# EAGLE board ESP32 Relay Mainboard (EAGLE 9.3.0)
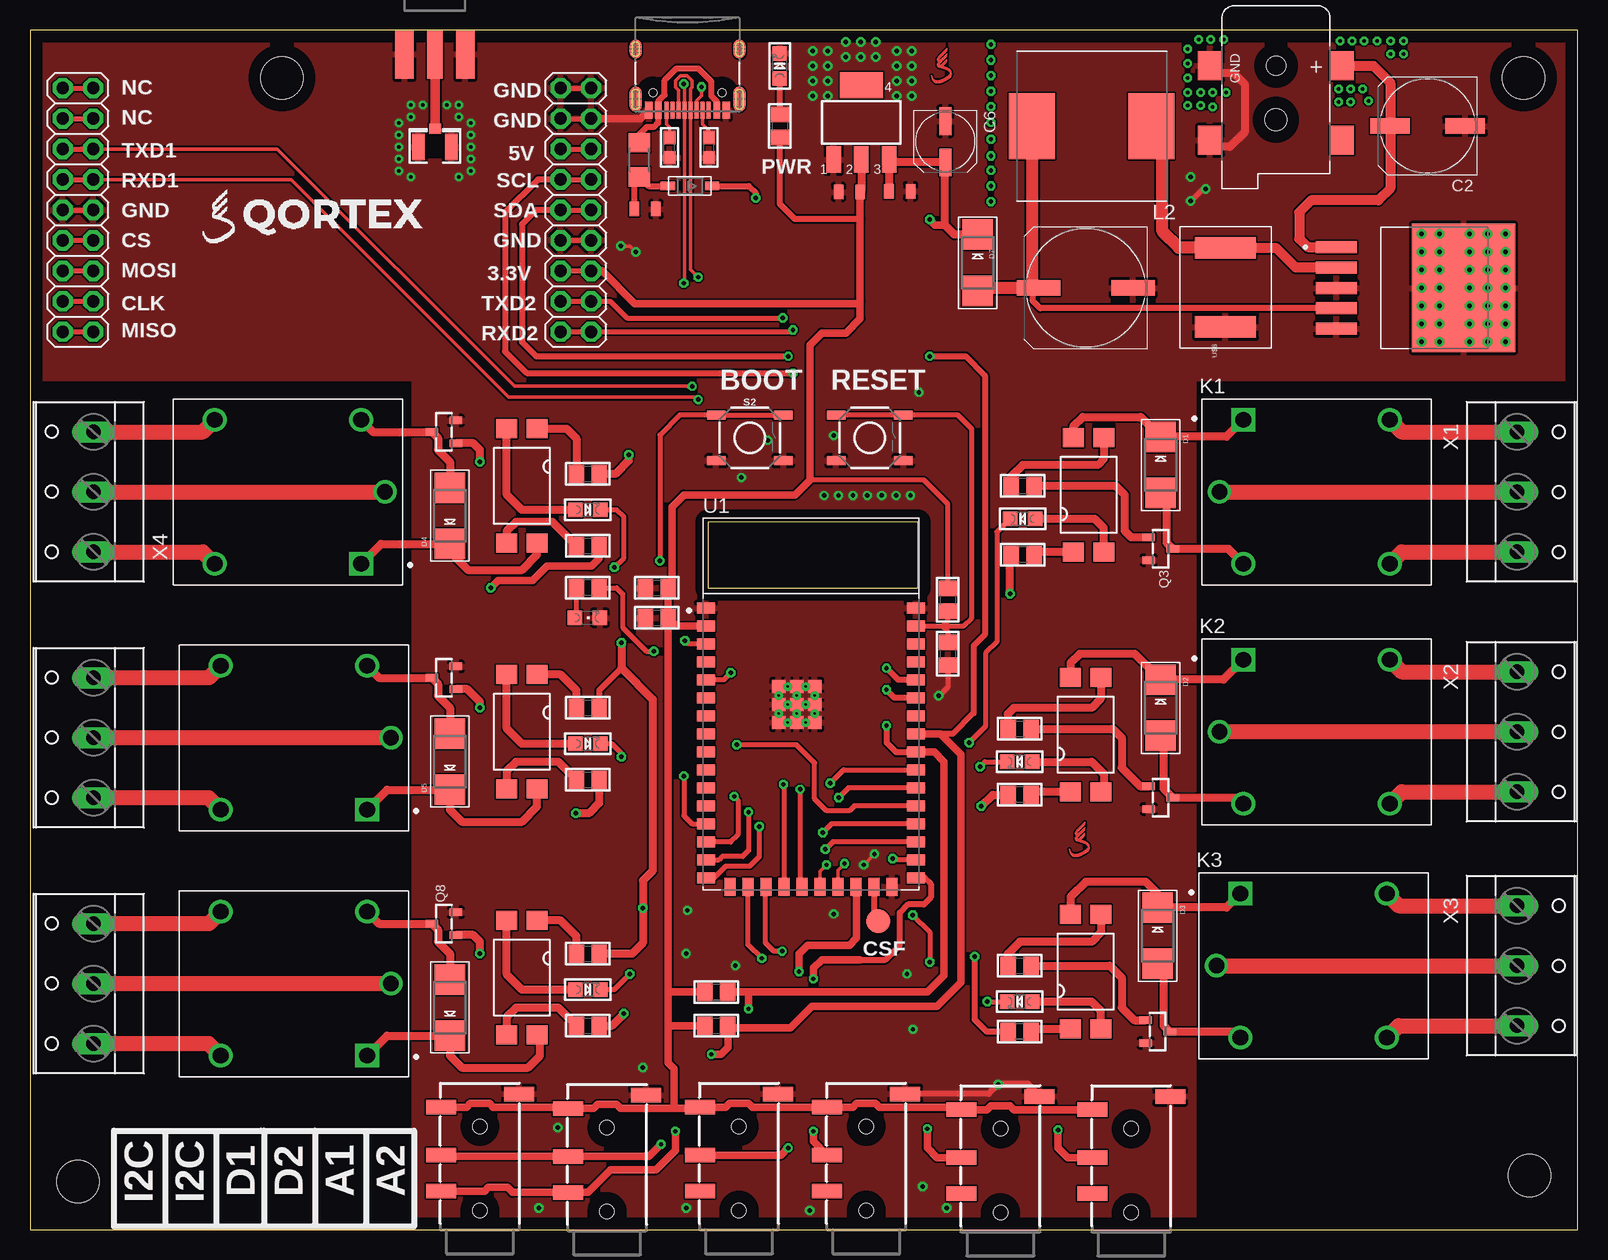
[diagram p0: board, top side]
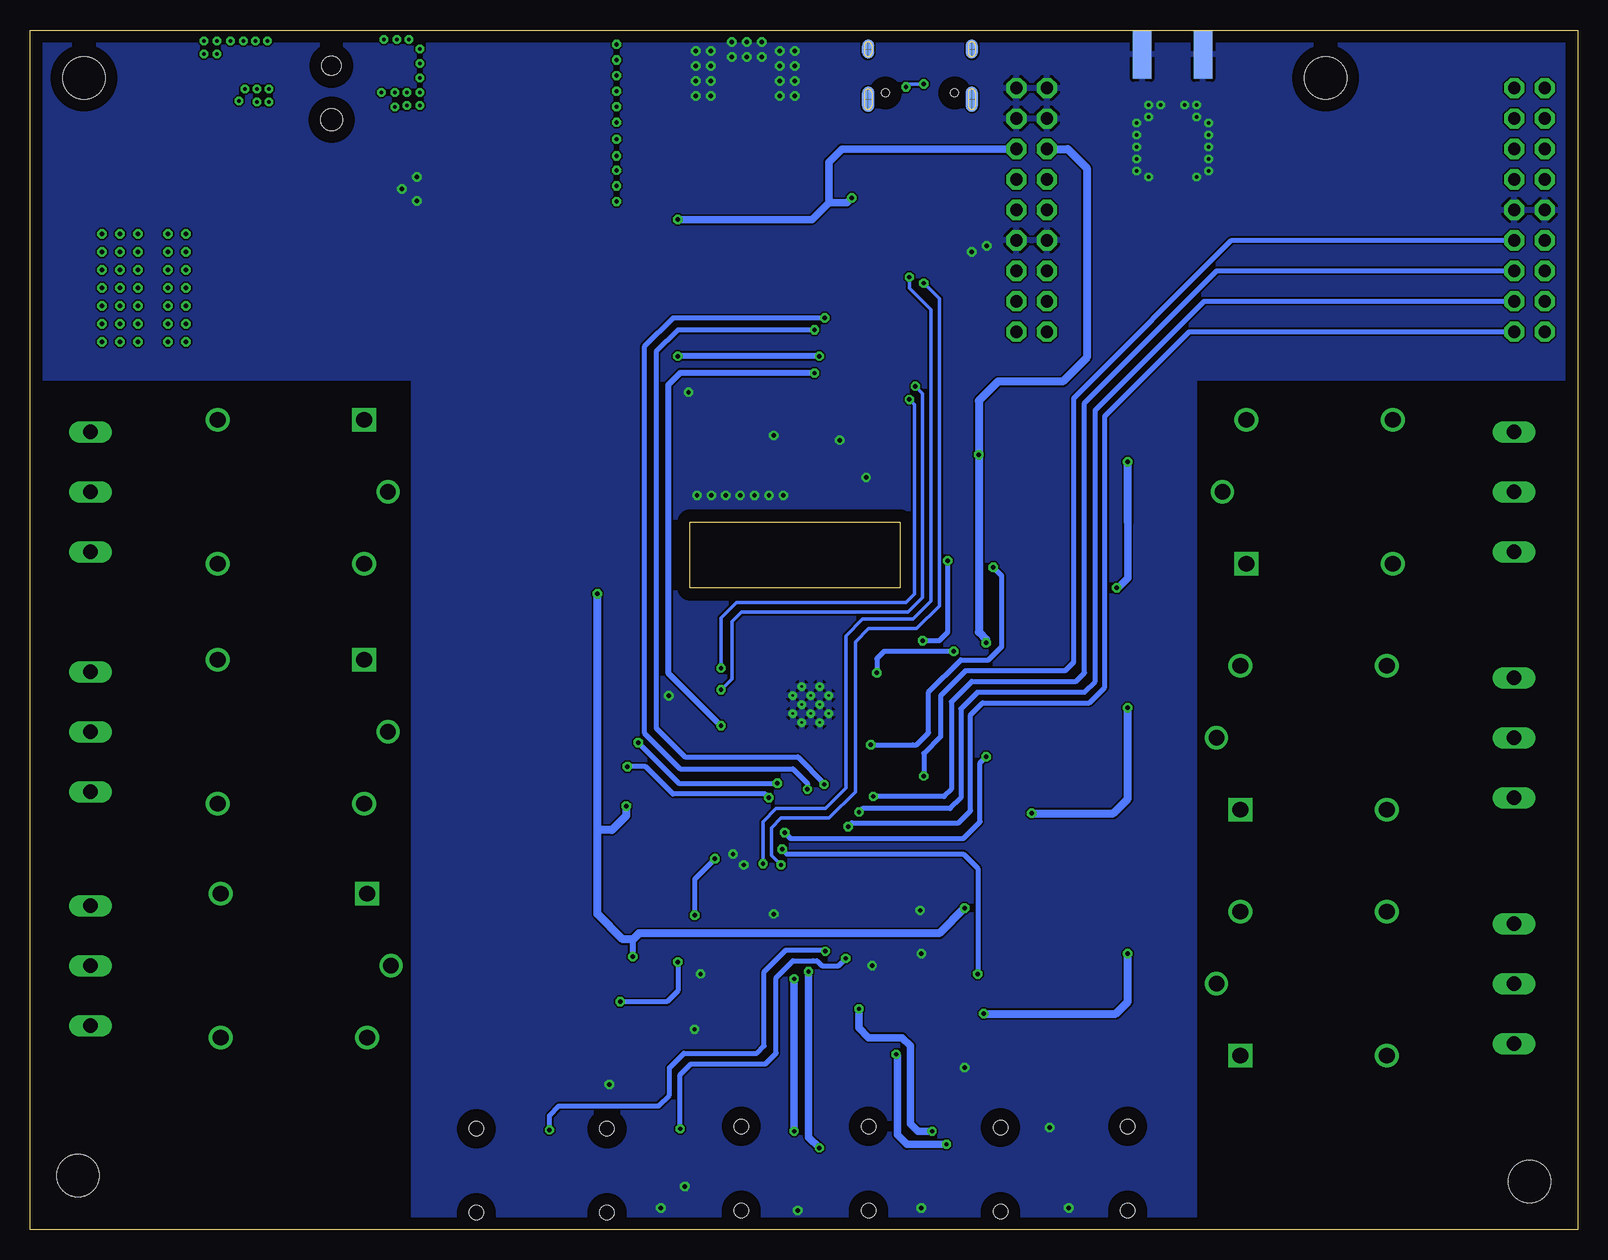
[diagram p1: board, bottom side, seen from below]

Size 129 x 100 mm. Coordinates in mm from the lower left corner, seen from the top.
Outline: 0,0 129,0 129,100 0,100 0,0
Outline: 56.5,59 56.5,53.5 74,53.5 74,59 56.5,59
Copper layers (1*16): Top 0.035mm / dielectric 1.5mm / Bottom 0.035mm
Design rules "default *": minimum track width 6mil, minimum drill 0.35mm, track to track 6mil, track to pad 6mil, pad to pad 6mil, via to via 6mil, smd to smd 6mil, copper to edge 40mil, drill to drill 6mil, minimum pad ring 10mil, minimum via ring 8mil, stop-mask expansion 4mil, vias tented up to drill 13mil, thermal gap 10mil
Holes 3.5 mm at 124.5,96 4,4 125,4.5 21,96

## Footprints (pad centres in the part's own frame; a part is rotated, then mirrored left to right if it is on the bottom)
SOT223 = smd 1.219 x 2.235: 1 -2.311,-3.099; 2 0,-3.099; 3 2.311,-3.099 | smd 3.6 x 2.2: 4 0,3.099
0805 = smd 0.8 x 1.2: 1 -0.9,0; 2 0.9,0
UD-8X10_NICHICON = smd 3.3 x 1.3: + 3.125,0; - -3.125,0
UD-10X10_NICHICON = smd 3.6 x 1.3: + 3.925,0; - -3.95,0
UD-5X5,8_NICHICON = smd 2.3 x 1: + 1.725,0; - -1.7,0
0805' = smd 1.3 x 1.5: 1 -0.95,0; 2 0.95,0
DCJACK_2MM_SMT = smd 2.4 x 2: GND 0,-5.5; GNDBREAK 6.2,-5.5; PWR1 0,5.5; PWR2 6.2,5.5 | hole 1.6: 0,0 | hole 1.8: 4.5,0
USB-C-16P = smd 0.3 x 1.45: A5 -1.25,0; A6 -0.25,0; A7 0.25,0; A8 1.25,0; B5 1.75,0; B6 0.75,0; B7 -0.75,0; B8 -1.75,0 | smd 0.6 x 1.45: GND -3.225,0; GND2 3.225,0 | smd 1 x 2.1: SHLD1 -4.32,-0.915; SHLD2 4.32,-0.915 | smd 1 x 2.1 bottom: SHLD3 -4.32,-0.915; SHLD4 4.32,-0.915 | smd 1 x 1.6: SHLD5 -4.32,-5.095; SHLD8 4.32,-5.095 | smd 1 x 1.6 bottom: SHLD6 -4.32,-5.095; SHLD7 4.32,-5.095 | smd 0.55 x 1.45: VBUS1 -2.45,0; VBUS2 2.45,0 | hole 0.65: -2.89,-1.445; 2.89,-1.445
SMADIODE = smd 2.54 x 2.54: A 2.349,0; C -2.349,0
SOD-123 = smd 1.2 x 0.7: A 1.85,0; C -1.85,0
R1206 = smd 1.6 x 1.803: 1 -1.422,0; 2 1.422,0
AUDIO_JACK_3.5MM_TRRS_SMD_RA = smd 1.2 x 2.5: EARTH 11.3,-3.25; RING1 6.2,3.25; RING2 3.2,3.25; TIP 10.2,3.25 | hole 1.2: 1.6,0; 8.6,0
2X09-BIG = drill 1.016 pad 1.676 octagon: 1 -10.16,-1.27; 2 -10.16,1.27; 3 -7.62,-1.27; 4 -7.62,1.27; 5 -5.08,-1.27; 6 -5.08,1.27; 7 -2.54,-1.27; 8 -2.54,1.27; 9 0,-1.27; 10 0,1.27; 11 2.54,-1.27; 12 2.54,1.27; 13 5.08,-1.27; 14 5.08,1.27; 15 7.62,-1.27; 16 7.62,1.27; 17 10.16,-1.27; 18 10.16,1.27
RELAY_SRD-05VDC-SL-C = drill 1.32 square: A1 -6.1,6 | drill 1.32: A2 -6.1,-6; NC 6.1,6; NO 6.1,-6 | drill 1.29: COM -8.1,0
INDM1250X1250X600 = smd 3.85 x 5.5: 1 -4.975,0; 2 4.975,0
CHIPLED_0805 = smd 1.2 x 1.2: A 0,-1.05; C 0,1.05
SMD4-7 = smd 1.78 x 1.55: 1 -1.27,-4.77; 2 1.27,-4.77; 3 1.27,4.77; 4 -1.27,4.77
SOT23-R = smd 0.635 x 1.016: 1 -0.95,-1; 2 0.95,-1; 3 0,1
0603 = smd 1.1 x 1: 1 -0.85,0; 2 0.85,0
TACTILE_SWITCH_SMD_5.2MM = smd 1.524 x 0.762: 1 -2.794,1.905; 2 2.794,1.905; 3 -2.794,-1.905; 4 2.794,-1.905
TP20R = smd 2 x 2: TP 0,0
XCVR_ESP32-S2-WROOM = smd 1.5 x 0.9: 1 -8.75,8; 2 -8.75,6.5; 3 -8.75,5; 4 -8.75,3.5; 5 -8.75,2; 6 -8.75,0.5; 7 -8.75,-1; 8 -8.75,-2.5; 9 -8.75,-4; 10 -8.75,-5.5; 11 -8.75,-7; 12 -8.75,-8.5; 13 -8.75,-10; 14 -8.75,-11.5; 15 -8.75,-13; 16 -8.75,-14.5; 27 8.75,-14.5; 28 8.75,-13; 29 8.75,-11.5; 30 8.75,-10; 31 8.75,-8.5; 32 8.75,-7; 33 8.75,-5.5; 34 8.75,-4; 35 8.75,-2.5; 36 8.75,-1; 37 8.75,0.5; 38 8.75,2; 39 8.75,3.5; 40 8.75,5; 41 8.75,6.5; 42 8.75,8 | smd 0.9 x 1.5: 17 -6.75,-15.25; 18 -5.25,-15.25; 19 -3.75,-15.25; 20 -2.25,-15.25; 21 -0.75,-15.25; 22 0.75,-15.25; 23 2.25,-15.25; 24 3.75,-15.25; 25 5.25,-15.25; 26 6.75,-15.25 | smd 1.1 x 1.1: 43.1 -1.19,-0.05; 43.2 -2.69,-0.05; 43.3 0.31,-0.05; 43.4 -2.69,-1.55; 43.5 -1.19,-1.55; 43.6 0.31,-1.55; 43.7 -2.69,1.45; 43.8 -1.19,1.45; 43.9 0.31,1.45 | drill 0.2 pad 0.4: 43.10 -1.19,0.7; 43.11 -2.69,0.7; 43.12 0.31,0.7; 43.13 -2.69,-0.8; 43.14 -1.19,-0.8; 43.15 0.31,-0.8; 43.16 -1.94,1.45; 43.17 -0.44,1.45; 43.18 -1.94,-0.05; 43.19 -0.44,-0.05; 43.20 -1.94,-1.55; 43.21 -0.44,-1.55
VREG_TPS79625KTTR = smd 3.4 x 1: 1 -10.6,3.4; 2 -10.6,1.7; 3 -10.6,0; 4 -10.6,-1.7; 5 -10.6,-3.4 | smd 8.6 x 10.7: 6 0,0
DO-214AB = smd 1.778 x 5.08: IN -3.302,0; OUT 3.302,0
W237-103 = drill 1.194 long: 1 -5,-1.29; 2 0,-1.29; 3 5,-1.29
SMA_EDGELAUNCH = smd 4.064 x 1.524: GND@1 2.032,-2.54; GND@2 2.032,2.54 | smd 4.064 x 1.524 bottom: GND@3 2.032,2.54; GND@4 2.032,-2.54 | smd 4.064 x 1.27: P 2.032,0
U.FL = smd 2.2 x 1.05: 1 0,1.375; 2 0,-1.375 | smd 0.8 x 1: 3 1.525,0

## Placement (x,y rotation side)
3.3V  [SOT223]  69.3,92.3 0 top
C1  1uF  [0805]  51.28,85.07 0 top
C2  10uF  [UD-8X10_NICHICON]  116.5,92 180 top
C3  100uF  [UD-10X10_NICHICON]  88,78.5 180 top
C6  10uF  [UD-5X5,8_NICHICON]  76.3,90.7 270 top
C7  1uF  [0805]  68.3,86.5 0 top
C8  10uF  [0805]  72.5,86.55 180 top
C9  0.1uF  [0805']  76.5,48 270 top
C10  0.1uF  [0805']  52.25,53.5 0 top
C11  0.1uf  [0805']  52.25,51 0 top
CN1  [DCJACK_2MM_SMT]  103.86,97.02 270 top
CONN1  [USB-C-16P]  54.81,93.31 180 top
D1  [SMADIODE]  94.25,63.75 270 top
D2  [SMADIODE]  94.25,43.5 270 top
D3  [SMADIODE]  94,24.5 270 top
D4  [SMADIODE]  35,59.5 90 top
D5  [SMADIODE]  35,39 90 top
D6  [SMADIODE]  35,18.5 90 top
D7  [SMADIODE]  79,80.6 270 top
D8  [SOD-123]  55,87 180 top
F2  [R1206]  50.8,89.18 270 top
J1  AUDIO_JACK_TRRSSMD_RA  [AUDIO_JACK_3.5MM_TRRS_SMD_RA]  91.8,-0.2 90 top
J2  AUDIO_JACK_TRRSSMD_RA  [AUDIO_JACK_3.5MM_TRRS_SMD_RA]  80.9,-0.2 90 top
J3  AUDIO_JACK_TRRSSMD_RA  [AUDIO_JACK_3.5MM_TRRS_SMD_RA]  48.1,-0.1 90 top
J4  AUDIO_JACK_TRRSSMD_RA  [AUDIO_JACK_3.5MM_TRRS_SMD_RA]  37.5,0 90 top
J5  AUDIO_JACK_TRRSSMD_RA  [AUDIO_JACK_3.5MM_TRRS_SMD_RA]  59.1,0 90 top
J6  AUDIO_JACK_TRRSSMD_RA  [AUDIO_JACK_3.5MM_TRRS_SMD_RA]  69.7,0 90 top
JP4  [2X09-BIG]  4,85 90 top
JP5  [2X09-BIG]  45.5,85 90 top
K1  SRD-05VDC-SL-C  [RELAY_SRD-05VDC-SL-C]  107.25,61.5 0 top
K2  SRD-05VDC-SL-C  [RELAY_SRD-05VDC-SL-C]  107.25,41.5 0 top
K3  SRD-05VDC-SL-C  [RELAY_SRD-05VDC-SL-C]  107,22 0 top
K4  SRD-05VDC-SL-C  [RELAY_SRD-05VDC-SL-C]  21.5,61.5 180 top
K5  SRD-05VDC-SL-C  [RELAY_SRD-05VDC-SL-C]  22,41 180 top
K6  SRD-05VDC-SL-C  [RELAY_SRD-05VDC-SL-C]  22,20.5 180 top
L2  DR125-6R8-R  [INDM1250X1250X600]  88.5,92 180 top
LED1  [CHIPLED_0805]  46.45,51 270 top
LED2  [CHIPLED_0805]  82.75,59.25 90 top
LED3  [CHIPLED_0805]  82.5,39 90 top
LED4  [CHIPLED_0805]  82.5,19 90 top
LED5  [CHIPLED_0805]  46.5,60 270 top
LED6  [CHIPLED_0805]  46.5,40.5 270 top
LED7  [CHIPLED_0805]  46.5,20 270 top
LED8  [CHIPLED_0805]  62.5,97 0 top
OK1  SFH6186-5  [SMD4-7]  88.25,61.25 0 top
OK2  SFH6186-5  [SMD4-7]  88,41.25 0 top
OK3  SFH6186-5  [SMD4-7]  88,21.5 0 top
OK4  SFH6186-5  [SMD4-7]  41,62 180 top
OK5  SFH6186-5  [SMD4-7]  41,41.5 180 top
OK6  SFH6186-5  [SMD4-7]  41,21 180 top
Q3  [SOT23-R]  94.25,56.75 270 top
Q4  [SOT23-R]  94.25,36 270 top
Q5  [SOT23-R]  94,16.5 270 top
Q6  [SOT23-R]  34.5,66.5 90 top
Q7  [SOT23-R]  34.5,46 90 top
Q8  [SOT23-R]  34.5,25.5 90 top
R1  10K  [0805']  57.2,19.8 0 top
R2  10K  [0805']  57.2,17 0 top
R3  5.1K  [0603]  53.3,90.2 90 top
R4  10K  [0805']  76.5,52.5 270 top
R5  1K  [0805']  46.5,53.5 180 top
R6  5.1K  [0603]  56.6,90.2 90 top
R10  1k  [0805']  82.75,62 0 top
R11  1k  [0805']  82.75,56.25 180 top
R12  1k  [0805']  82.5,41.75 0 top
R13  1k  [0805']  82.5,36.25 180 top
R14  1K  [0805']  82.5,22 0 top
R15  1k  [0805']  82.5,16.5 180 top
R16  1k  [0805']  46.5,57 0 top
R17  1k  [0805']  46.5,63 0 top
R18  1k  [0805']  46.5,37.5 0 top
R19  1k  [0805']  46.5,43.5 0 top
R20  1k  [0805']  46.5,17 0 top
R21  1k  [0805']  46.5,23 0 top
R22  1K  [0805']  62.5,92 270 top
S1  MOMENTARY-SWITCH-SPST-SMD-5.2-REDUNDANT  [TACTILE_SWITCH_SMD_5.2MM]  70,66 0 top
S2  MOMENTARY-SWITCH-SPST-SMD-5.2-REDUNDANT  [TACTILE_SWITCH_SMD_5.2MM]  60,66 0 top
TP1  TPTP20R  [TP20R]  70.7,25.7 0 top
U1  ESP32-S2-WROOM  [XCVR_ESP32-S2-WROOM]  65.1,43.82 0 top
U4  LM2576SX-5.0/NOPB  [VREG_TPS79625KTTR]  119.5,78.5 0 top
U$1  [QORTEX_00#PNG]  23.5,84.5 0 top
U$8  DO-214AB  [DO-214AB]  99.66,78.54 90 top
U$25  [QORTEX_ICON_PROTOTYPE_01#PNG]  76,97 0 top
U$27  [QORTEX_ICON_PROTOTYPE_01#PNG]  87.5,32.5 0 top
X1  [W237-103]  125.25,61.5 270 top
X2  [W237-103]  125.25,41.5 270 top
X3  [W237-103]  125.25,22 270 top
X4  [W237-103]  4,61.5 90 top
X5  [W237-103]  4,41 90 top
X6  [W237-103]  4,20.5 90 top
X7  [SMA_EDGELAUNCH]  33.75,100 270 top
X8  [U.FL]  33.75,90.25 90 top

## Library data of the parts
3.3V = v-reg-2
C1 C7 C8 = SparkFun-Capacitors; PROD_ID: CAP-08402
C2 C3 C6 = rcl; SPICEPREFIX: C
C9-C11 LED2-LED8 Q3-Q8 R1-R6 R10-R22 = microbuilder
CN1 D1-D8 F2 JP4 JP5 LED1 X7 X8 = adafruit
CONN1 = SparkFun-Connectors; PROD_ID: CONN-14122
J1-J6 = SparkFun-Connectors; PROD_ID: CONN-10676; SF_ID: PRT-12639
K1-K6 = SRD-05VDC-SL-C; AVAILABILITY: Unavailable; DESCRIPTION: 5V Trigger Relay Module For Arduino And Raspberry Pi 5V Trigger Relay Module For Arduino And Raspberry Pi; MF: Songle Relay; MP: SRD-05VDC-SL-C; PACKAGE: None; PRICE: None
L2 = DR125-6R8-R; ARROW_ELECTRONICS-PURCHASE-URL: https://snapeda.com/shop?store=Arrow+Electronics&id=1760770; AVAILABILITY: Good; DESCRIPTION: 6.8µH Shielded Wirewound Inductor 6.64A 12.3mOhm Nonstandard; MF: Eaton; MOUSER-PURCHASE-URL: https://snapeda.com/shop?store=Mouser&id=1760770; MP: DR125-6R8-R; PACKAGE: Nonstandard Eaton; PRICE: None
OK1-OK6 = optocoupler; MF: VISHAY/TELEFUNKEN; MPN: SFH6186-5; OC_FARNELL: 1469584; OC_NEWARK: 58K2211
S1 S2 = SparkFun-Switches; PROD_ID: SWCH-08247; SF_SKU: COM-08720
TP1 = testpad
U1 = ESP32-S2-WROOM; AVAILABILITY: Unavailable; DESCRIPTION: WiFi 802.11b/g/n Transceiver Module 2.4GHz PCB Trace Surface Mount; MF: Espressif Systems; MP: ESP32-S2-WROOM; PACKAGE: VFQFN-56 Espressif Systems; PRICE: None
U4 = LM2576SX-5.0_NOPB; AVAILABILITY: Unavailable; DESCRIPTION: Buck Switching Regulator IC Positive Fixed 5V 1 Output 3A TO-263-6, D²Pak (5 Leads + Tab), TO-263BA; MF: National Semiconductor; MP: LM2576SX50; PACKAGE: TO-263-6 National Semiconductor; PRICE: None
U$1 = qortex_logo
U$8 = DO-214AB; AVAILABILITY: Unavailable; DESCRIPTION: Diode Schottky 40V 4A Surface Mount SMC; MF: Littelfuse Inc.; MP: DO-214AB; PACKAGE: DO-214AB-214 Littelfuse Inc.; PRICE: None
U$25 U$27 = qicon_top
X1-X6 = con-wago-500; MPN: 237-103; OC_FARNELL: unknown; OC_NEWARK: 18M7116

## Nets
5V: 3.3V.3 C6.+ C8.2 D7.C D8.C JP5.13 JP5.14 R11.2 R13.2 R15.2 R17.2 R19.2 R21.2
5V_BC: C3.+ D7.A L2.2 U4.4
+3V3: 3.3V.2 C7.2 C10.2 C11.2 J1.TIP J2.TIP J3.TIP J4.TIP J5.TIP J6.TIP JP5.5 JP5.6 R1.1 R2.1 R4.1 R22.2 U1.2
ADC1: J2.RING1 U1.18
ADC2: J1.RING1 U1.19
CHIP_EN: C9.1 R4.2 S1.1 S1.2 U1.41
CLK: JP4.3 JP4.4 U1.15
CS: JP4.7 JP4.8 U1.13
D+: CONN1.A6 CONN1.B6 U1.23
D-: CONN1.A7 CONN1.B7 U1.22
GND: 3.3V.1 C1.2 C2.- C3.- C6.- C7.1 C8.1 C9.2 C10.1 C11.1 CN1.GND CN1.GNDBREAK CONN1.GND CONN1.GND2 J1.EARTH J2.EARTH J3.EARTH J4.EARTH J5.EARTH J6.EARTH JP4.9 JP4.10 JP5.7 JP5.8 JP5.15 JP5.16 JP5.17 JP5.18 LED1.C LED8.C Q3.2 Q4.2 Q5.2 Q6.2 Q7.2 Q8.2 R3.1 R6.1 S1.3 S1.4 S2.3 S2.4 U1.1 U1.26 U1.42 U1.43.1 U1.43.2 U1.43.3 U1.43.4 U1.43.5 U1.43.6 U1.43.7 U1.43.8 U1.43.9 U1.43.10 U1.43.11 U1.43.12 U1.43.13 U1.43.14 U1.43.15 U1.43.16 U1.43.17 U1.43.18 U1.43.19 U1.43.20 U1.43.21 U4.3 U4.5 U4.6 U$8.IN X7.GND@1 X7.GND@2 X7.GND@3 X7.GND@4 X8.1 X8.2
GPIO0: S2.1 S2.2 U1.3
GPIO21: J5.RING1 U1.24
GPIO33: J6.RING1 U1.27
GPIO34: LED4.C U1.28
GPIO35: LED7.C U1.29
GPIO36: LED6.C U1.30
GPIO37: LED5.C U1.31
GPIO38: LED3.C U1.32
GPIO39: LED2.C U1.33
LED_BUILTIN: R5.1 U1.5
MISO: JP4.1 JP4.2 U1.16
MOSI: JP4.5 JP4.6 U1.14
N$1: C2.+ CN1.PWR1 U4.1
N$5: L2.1 U4.2 U$8.OUT
N$6: LED1.A R5.2
N$8: X7.P X8.3
N$9: OK1.1 R11.1
N$10: CONN1.A5 R6.2
N$11: LED2.A OK1.2
N$12: OK1.3 R10.1
N$13: CONN1.B5 R3.2
N$14: Q3.1 R10.2
N$15: D1.A K1.A2 Q3.3
N$16: D1.C K1.A1 OK1.4
N$17: TP1.TP U1.25
N$18: K1.NO X1.3
N$19: K1.COM X1.2
N$20: K1.NC X1.1
N$21: OK2.1 R13.1
N$22: LED3.A OK2.2
N$23: OK2.3 R12.1
N$24: Q4.1 R12.2
N$25: D2.A K2.A2 Q4.3
N$26: D2.C K2.A1 OK2.4
N$28: K2.NO X2.3
N$29: K2.COM X2.2
N$30: K2.NC X2.1
N$31: OK3.1 R15.1
N$32: LED4.A OK3.2
N$33: OK3.3 R14.1
N$34: Q5.1 R14.2
N$35: D3.A K3.A2 Q5.3
N$36: D3.C K3.A1 OK3.4
N$38: K3.NO X3.3
N$39: K3.COM X3.2
N$40: K3.NC X3.1
N$41: OK4.1 R17.1
N$42: LED5.A OK4.2
N$43: OK4.3 R16.1
N$44: Q6.1 R16.2
N$45: D4.A K4.A2 Q6.3
N$46: D4.C K4.A1 OK4.4
N$48: K4.NO X4.3
N$49: K4.COM X4.2
N$50: K4.NC X4.1
N$51: OK5.1 R19.1
N$52: LED6.A OK5.2
N$53: OK5.3 R18.1
N$54: Q7.1 R18.2
N$55: D5.A K5.A2 Q7.3
N$56: D5.C K5.A1 OK5.4
N$58: K5.NO X5.3
N$59: K5.COM X5.2
N$60: K5.NC X5.1
N$61: OK6.1 R21.1
N$62: LED7.A OK6.2
N$63: OK6.3 R20.1
N$64: Q8.1 R20.2
N$65: D6.A K6.A2 Q8.3
N$66: D6.C K6.A1 OK6.4
N$68: K6.NO X6.3
N$69: K6.COM X6.2
N$70: K6.NC X6.1
N$71: LED8.A R22.1
N$169: JP4.15 JP4.16
N$171: JP4.17 JP4.18
NC1: J5.RING2
NC2: J6.RING2
NC3: J1.RING2
NC4: J2.RING2
RXD1: JP4.13 JP4.14 U1.37
RXD2: JP5.1 JP5.2 U1.20
SCL: J3.RING2 J4.RING2 JP5.11 JP5.12 R1.2 U1.34
SDA: J3.RING1 J4.RING1 JP5.9 JP5.10 R2.2 U1.35
SHLD: CONN1.SHLD1 CONN1.SHLD2 CONN1.SHLD3 CONN1.SHLD4 CONN1.SHLD5 CONN1.SHLD6 CONN1.SHLD7 CONN1.SHLD8
TXD1: JP4.11 JP4.12 U1.38
TXD2: JP5.3 JP5.4 U1.21
VBUS: C1.1 D8.A F2.2
X_VBUS: CONN1.VBUS1 CONN1.VBUS2 F2.1

## Tracks (layer width: path | path; a pad name or v marks a point on that pad's centre or on a via)
5V  (via drill 0.38)
  Top 0.406: JP5.14 JP5.13
  Top 0.508: 49.3,46.8 47.45,44.95 R19.2 | R15.2 79.75,16.5 78.75,17.5 v78.75,22.75 | v60.5,86 60.5,86.4 59.9,87 D8.C
  Top 0.61: 76.25,83.75 75.45,83.75 v75,84.2
  Top 0.65: D7.C 77.05,82.95 76.25,83.75 76.25,88.92 C6.+ 71.84,88.97 3.3V.3 71.61,86.56 C8.2 | v49.9,64.6 49.9,64.1 48.8,63 R17.2 | v49.3,48.9 49.3,46.8 51.9,44.2 51.9,29.9 51.1,29.1 v51.1,26.8 51.1,23.9 50.2,23 R21.2 | v79.3,35.3 80.25,36.25 R13.2 | v81.7,53 81.7,56.15 R11.2
  Bottom 0.508: v78.75,22.75 78.75,24.2
  Bottom 0.61: v75,84.2 63.8,84.2 62.4,85.6 | 62.4,85.6 62.4,89 61.32,90.08 JP5.13 | 62.4,85.6 60.9,85.6 v60.5,86
  Bottom 0.65: JP5.14 42.48,90.08 40.9,88.5 40.9,72.7 42.9,70.7 48.3,70.7 49.9,69.1 v49.9,64.6 49.9,49.8 49.3,49.2 v49.3,48.9 | 81.7,33.3 81.7,26.3 79.6,24.2 78.75,24.2 78.25,24.7 53.2,24.7 v51.1,26.8 | 81.7,33.3 v81.7,53 | v79.3,35.3 79.3,34.5 80.5,33.3 81.7,33.3
5V_BC
  Top 0.508: C3.+ 83.6,78.03 83.6,77.4 84.2,76.8 U4.4
  Top 1.016: L2.2 83.53,79.05 C3.+ 79.25,78.5 D7.A
+3V3
  Top 0.406: JP5.6 JP5.5 | R4.1 76.5,60.5 74.5,62.5 65,62.5
  Top 0.508: 69.2,84.25 63.75,84.25 62.5,85.5 R22.2
  Top 0.61: 69.2,77.4 69.2,75.95 68,74.75 66,74.75 65,73.75 65,62.5 63.75,61.25 54.5,61.25 53.5,60.25 53.5,53.8 C10.2 C11.2 | 69.2,77.4 69.2,84.25 C7.2 | C11.2 53.88,50.32 U1.2 | C11.2 53.2,39.1 53.2,36.2 53.2,19.9 | 53.2,19.9 53.2,17.1 | 53.2,17.1 53.2,13.9 53.7,13.4 53.7,10.1 | JP5.5 47.68,79.92 50.4,77.2 69,77.2 69.2,77.4 | J4.TIP 36.38,10.2 36.7,10.52 38.3,10.52 38.62,10.2 44.75,10.2 J3.TIP 46.98,10.1 47.3,10.42 48.9,10.42 49.22,10.1 53.7,10.1 | 53.7,10.1 55.75,10.1 J5.TIP 57.98,10.2 58.3,10.52 59.9,10.52 60.22,10.2 J6.TIP 68.58,10.2 68.9,10.52 70.5,10.52 70.82,10.2 77.45,10.2 J2.TIP 79.78,10 80.1,10.32 81.7,10.32 82.02,10 J1.TIP | R1.1 53.3,19.8 53.2,19.9 | R2.1 53.3,17 53.2,17.1
  Top 0.65: 3.3V.2 69.3,86.6 C7.2
ADC1  (via drill 0.35)
  Top 0.406: v61,22.6 59.85,23.75 U1.18
  Top 0.61: J2.RING1 75.6,6 74.8,6.8 v74.8,8.4
  Bottom 0.406: v74.8,8.4 74.8,12.9 73.9,13.8 67.7,13.8 66.8,14.7 66.8,21 65.4,22.4 63.7,22.4 63.4,22.4 63,22 61.6,22 v61,22.6
ADC2  (via drill 0.35)
  Top 0.406: v62.7,23.2 62,23.2 61.3,23.9 61.3,28.52 U1.19
  Top 0.61: J1.RING1 86.5,6 85.7,6.8 v85.7,8.3
  Bottom 0.406: v85.7,8.3 85.7,9.5 84.9,10.3 76.6,10.3 75.7,11.2 75.7,13.5 74.5,14.7 68.4,14.7 67.8,15.3 67.8,21.5 66,23.3 62.7,23.3 v62.7,23.2
CHIP_EN
  Top 0.406: U1.41 76.07,50.32 | 76.07,50.32 76.5,50.75 R4.2 | 76.07,50.32 76.5,49.89 C9.1 | 76.07,50.32 77.82,50.32 78.5,51 78.5,66.75 77.34,67.91 S1.2 S1.1
CLK  (via drill 0.35)
  Top 0.406: JP4.4 JP4.3 | U1.15 57.42,30.82 57.7,31.1 59.4,31.1 59.9,31.6 v59.9,34.8
  Bottom 0.406: JP4.3 31.12,77.38 40.2,68.3 40.2,45.7 41.1,44.8 50,44.8 51.4,43.4 51.4,36 52.3,35.1 59.6,35.1 v59.9,34.8
CS  (via drill 0.35)
  Top 0.406: JP4.8 JP4.7 | U1.13 55.18,33.82 54.5,34.5 v54.5,37.8
  Bottom 0.406: JP4.7 28.84,82.46 42,69.3 42,47.3 42.7,46.6 51,46.6 53.1,44.5 53.1,41.1 54.5,39.7 v54.5,37.8
D+  (via drill 0.35)
  Top 0.305: CONN1.B6 54.06,94.97 53.82,95.22 53.82,95.78 54.22,96.18 54.78,96.18 55.18,95.78 55.18,95.22 55.06,95.09 CONN1.A6 55.06,80.04 v55.7,79.4 | v67.9,30.5 67.35,29.95 U1.23
  Bottom 0.305: v55.7,79.4 55.7,78.5 53.9,76.7 53.9,52.4 55.4,50.9 59.6,50.9 61,49.5 61,36.8 62.7,35.1 66.8,35.1 67.9,34 v67.9,30.5
D-  (via drill 0.35)
  Top 0.305: v54.5,95.5 54.56,95.44 CONN1.A7 54.56,78.96 v54.5,78.9 | v55.98,95.25 55.98,94.54 55.56,94.12 CONN1.B7 | v66.4,30.4 65.85,29.85 U1.22
  Bottom 0.305: v54.5,95.5 55.73,95.5 v55.98,95.25 | v66.4,30.4 67.2,31.2 67.2,33.5 66.4,34.3 62.4,34.3 60.2,36.5 60.2,49 59.1,50.1 55.1,50.1 53.2,52 53.2,77.6 v54.5,78.9
GND  (via drill 0.32, 0.35, 0.38)
  Top 0.305: v49.25,82 50,82 v50.5,81.5 | v69.5,30.4 v70.4,31.3
  Top 0.406: JP5.8 JP5.7 | JP5.16 JP5.15 | JP5.18 JP5.17 | C9.2 76.5,45.25 v75.75,44.5 | v96.75,85.75 97.75,86.75 v98,86.75 | JP4.10 JP4.9
  Top 0.508: v80.7,12.1 79.9,11.3 J6.EARTH
  Top 0.61: v80.7,12.1 83.15,12.1 J2.EARTH | CONN1.GND2 50.88,92.6 46.79,92.6 JP5.15
  Top 0.65: 98.71,90.82 CN1.GNDBREAK 98.92,90.26 100.01,90.26 101.25,91.5 101.25,95.5 100.3,96.45 99.28,96.45 98.71,97.02 CN1.GND
  other vias: 44,8.5 42.4,1.8 51.1,13.5 54.7,1.8 65,1.6 76.4,1.8 74.4,3.6 96.75,87.75 34.75,93.75 35.75,93.75 35.75,92.75 36.75,92.25 36.75,91.25 36.75,90.25 36.75,89.25 36.75,88.25 35.75,87.75 32.75,93.75 31.75,93.75 31.75,92.75 30.75,92.25 30.75,91.25 30.75,90.25 30.75,89.25 30.75,88.25 31.75,87.75 65.25,94.5 66.5,94.5 65.25,95.75 66.5,95.75 65.25,97 66.5,97 65.25,98.25 66.5,98.25 68,97.75 68,99 69.25,99 69.25,97.75 70.5,99 70.5,97.75 72.25,98.25 72.25,97 72.25,95.75 72.25,94.5 73.5,98.25 73.5,97 73.5,95.75 73.5,94.5 54.8,26.6 54.7,23 58.8,22 67,26.3 73.1,21.3 73.6,16.7 61.5,65.8 59.3,62.7 67,66.2 74.1,69.8 66.2,61.2 67.4,61.2 68.6,61.2 69.8,61.2 71,61.2 72.2,61.2 73.4,61.2
  pour Top (isolate 0.012): -3,104 -3,71 32,71 32,-4 97,-4 97,71 134,71 134,104
  pour Bottom (isolate 0.012): -3,109 -3,71 32,71 32,-4 97,-4 97,71 134,71 134,107 134,109
GPIO0  (via drill 0.35, 0.38)
  Top 0.406: S2.2 S2.1 54.16,67.91 52.5,66.25 v52.5,55.75 | U1.3 54.88,48.82 v54.6,49.1
  Bottom 0.406: v52.5,55.75 52.5,53.5 52.5,52.7 52.5,49.8 53.2,49.1 v54.6,49.1
GPIO21  (via drill 0.35)
  Top 0.61: J5.RING1 62.6,6.2 v63.2,6.8 | v64.1,21.5 64.1,23 64.8,23.7 68.3,23.7 68.9,24.3 68.9,28.52 U1.24
  Bottom 0.61: v63.2,6.8 64.1,7.7 v64.1,21.5
GPIO33  (via drill 0.35)
  Top 0.508: 69.2,22.5 71.3,22.5 72.5,23.7 72.5,26.4 73.2,27.1 74.5,27.1 75.1,27.7 75.1,28.8 74.58,29.32 U1.27
  Top 0.61: J6.RING1 65.3,7.35 v65.3,8.2 | v65.3,20.9 65.3,21.8 66,22.5 69.2,22.5
  Bottom 0.61: v65.3,8.2 v65.3,20.9
GPIO34  (via drill 0.38)
  Top 0.406: U1.28 71.98,30.82 v71.9,30.9 | v73.6,26.2 75,24.8 v75,22.3 | v79.8,19 LED4.C
  Bottom 0.406: v71.9,30.9 73.6,29.2 v73.6,26.2 | v75,22.3 75,19.9 75.9,19 v79.8,19
GPIO35  (via drill 0.38)
  Top 0.406: U1.29 66.92,32.32 v66.3,31.7 | v50,21.3 48.7,20 LED7.C
  Bottom 0.406: v66.3,31.7 65.9,31.3 51.2,31.3 50,30.1 v50,21.3
GPIO36  (via drill 0.38)
  Top 0.406: U1.30 66.82,33.82 v66.1,33.1 | v49.3,39.4 49.3,39.7 48.5,40.5 LED6.C
  Bottom 0.406: v66.1,33.1 65.6,32.6 53.8,32.6 53.1,32.6 51.2,32.6 49.8,34 49.8,38.9 v49.3,39.4
GPIO37  (via drill 0.38)
  Top 0.406: U1.31 68.72,35.32 68.3,34.9 66.4,34.9 65.4,35.9 65.4,38.9 63.9,40.4 v58.9,40.4 | v48.7,55.2 49.5,56 49.5,59.4 48.9,60 LED5.C
  Bottom 0.406: v58.9,40.4 55.4,40.4 55.1,40.4 54.1,41.4 54.1,44.8 51.4,47.5 49.1,47.5 48,48.6 48,54.5 v48.7,55.2
GPIO38  (via drill 0.38)
  Top 0.406: U1.32 68.22,36.82 v67.4,36 | v79.2,38.6 79.6,39 LED3.C
  Bottom 0.406: v67.4,36 67.7,36.3 75.4,36.3 77.7,38.6 v79.2,38.6
GPIO39  (via drill 0.38)
  Top 0.406: LED2.C 80.6,58.15 80.6,49 79.65,48.05 79.65,41.95 v78.3,40.6 | v66.7,37.2 67.82,38.32 U1.33
  Bottom 0.406: v78.3,40.6 74.9,37.2 v66.7,37.2
LED_BUILTIN  (via drill 0.38)
  Top 0.406: R5.1 48.9,53.5 49.4,53 49.4,50.2 51.4,48.2 v52,48.2 | v58.4,46.4 57.82,45.82 U1.5
  Bottom 0.406: v52,48.2 57.8,48.2 58.4,47.6 v58.4,46.4
MISO  (via drill 0.38)
  Top 0.406: JP4.2 JP4.1 | U1.16 57.02,29.32 58,30.3 60,30.3 60.8,31.1 v60.8,33.6
  Bottom 0.406: v60.8,33.6 60.5,33.9 51.6,33.9 50.6,34.9 50.6,42.9 49.6,43.9 40.7,43.9 39.4,45.2 39.4,67.8 32.36,74.84 JP4.1
MOSI  (via drill 0.35)
  Top 0.406: JP4.6 JP4.5 | v58.7,36.1 59,35.8 59,32.9 58.4,32.3 58.38,32.32 U1.14
  Bottom 0.406: JP4.5 30.08,79.92 41.1,68.9 41.1,46.4 41.8,45.7 50.5,45.7 52.2,44 52.2,36.7 52.8,36.1 v58.7,36.1
N$1
  Top 0.813: CN1.PWR1 111.98,97.02 113.38,95.62 C2.+ 113.38,86.78 112.4,85.8 106.8,85.8 105.8,84.8 105.8,82.6 106.5,81.9 U4.1
N$2  (via drill 0.35)
  other vias: 123,74
N$3  (via drill 0.35)
  other vias: 123,75.5
N$4  (via drill 0.35)
  other vias: 123,77
N$5
  Top 0.813: U4.2 105.5,80.2 103.9,81.8 99.7,81.8 U$8.OUT
  Top 1.016: U$8.OUT 95.76,81.84 94.4,83.2 94.4,91.08 L2.1
N$6
  Top 0.406: LED1.A 45.55,51.15 R5.2
N$7  (via drill 0.35)
  other vias: 123,78.5
N$8
  Top 0.8: X7.P X8.3
N$9
  Top 0.65: OK1.1 83.93,56.48 R11.1
N$10
  Top 0.305: CONN1.A5 56.06,92.14 56.6,91.6 R6.2
N$11
  Top 0.65: OK1.2 89.52,58.48 88.75,59.25 LED2.A
N$12
  Top 0.65: OK1.3 89.52,64.27 89,63.75 82.75,63.75 81.8,62.8 R10.1
N$13
  Top 0.305: CONN1.B5 53.06,92.14 53.3,91.9 R3.2
N$14
  Top 0.65: Q3.1 91.8,57.7 91.25,58.25 91.25,61.25 90.5,62 R10.2
N$15
  Top 0.65: D1.A 94.35,61.5 94.75,61.5 94.75,57.25 Q3.3 99.9,56.75 K1.A2
N$16
  Top 0.65: K1.A1 99.75,66.1 D1.C 92.6,67.75 87.75,67.75 86.98,66.98 OK1.4
N$17
  Top 0.508: U1.25 70.35,26.05 TP1.TP
N$18
  Top 1.27: K1.NO 114.35,56.5 X1.3
N$19
  Top 1.27: K1.COM X1.2
N$20
  Top 1.27: K1.NC 114.35,66.5 X1.1
N$21
  Top 0.65: OK2.1 83.68,36.48 R13.1
N$22
  Top 0.65: LED3.A 88.5,39 89.5,38 89.5,36.71 OK2.2
N$23
  Top 0.65: OK2.3 89.27,44.27 88.5,43.5 82,43.5 81.5,43 81.5,41.8 R12.1
N$24
  Top 0.65: R12.2 90.25,41.75 91,41 91,38.5 92.55,36.95 Q4.1
N$25
  Top 0.65: K2.A2 100.65,36 Q4.3 94.5,36.75 94.5,40.9 D2.A
N$26
  Top 0.65: K2.A1 99.5,45.85 D2.C 92.1,48 87.5,48 86.73,47.23 OK2.4
N$28
  Top 1.27: K2.NO 114.35,36.5 X2.3
N$29
  Top 1.27: X2.2 K2.COM
N$30
  Top 1.27: K2.NC 114.35,46.5 X2.1
N$31
  Top 0.65: R15.1 83.68,16.73 OK3.1
N$32
  Top 0.65: OK3.2 89.27,18.23 88.5,19 LED4.A
N$33
  Top 0.65: OK3.3 89.27,24.77 88.5,24 82.5,24 81.5,23 81.5,22.05 R14.1
N$34
  Top 0.65: R14.2 90,22 91,21 91,18.5 92.05,17.45 Q5.1
N$35
  Top 0.65: K3.A2 100.4,16.5 Q5.3 94.5,17 94.5,21.65 D3.A
N$36
  Top 0.65: K3.A1 99.75,26.85 D3.C 94,28 93,29 88,29 86.73,27.73 OK3.4
N$38
  Top 1.27: K3.NO 114.1,17 X3.3
N$39
  Top 1.27: K3.COM X3.2
N$40
  Top 1.27: K3.NC 114.1,27 X3.1
N$41
  Top 0.65: OK4.1 44.73,66.77 45.55,65.95 R17.1
N$42
  Top 0.65: LED5.A 41,60 39.73,61.27 OK4.2
N$43
  Top 0.65: R16.1 43.55,59 40.5,59 39.73,58.23 OK4.3
N$44  (via drill 0.35, 0.38)
  Top 0.61: R16.2 47.45,55.95 46.8,55.3 43.1,55.3 41.9,54.1 39,54.1 v38.4,53.5
  Top 0.65: v37.5,64 37.5,65 36.95,65.55 Q6.1
  Bottom 0.61: v38.4,53.5 38.3,53.5 37.5,54.3 37.5,59
  Bottom 0.65: 37.5,59 v37.5,64
N$45
  Top 0.65: K4.A2 28.6,66.5 Q6.3 34,66 34,65 35,64 D4.A
N$46
  Top 0.65: K4.A1 29.25,57.15 D4.C 35,56.5 36.5,55 41,55 42.27,56.27 OK4.4
N$48
  Top 1.27: X4.3 14.4,66.5 K4.NO
N$49
  Top 1.27: X4.2 K4.COM
N$50
  Top 1.27: X4.1 14.4,56.5 K4.NC
N$51
  Top 0.65: R19.1 45.55,44.95 44.23,46.27 OK5.1
N$52
  Top 0.65: LED6.A 41,40.5 39.73,41.77 OK5.2
N$53
  Top 0.65: R18.1 44.05,39 40.5,39 39.73,38.23 OK5.3
N$54  (via drill 0.35, 0.38)
  Top 0.65: v37.5,43.5 37.5,44 36.45,45.05 Q7.1 | R18.2 47.45,35.55 46.6,34.7 v45.5,34.7
  Bottom 0.65: v37.5,43.5 37.5,39.9 37.5,39.5 37.5,35.9 38.7,34.7 v45.5,34.7
N$55
  Top 0.65: K5.A2 29.1,46 Q7.3 34,45.5 34,44.5 35,43.5 D5.A
N$56
  Top 0.65: K5.A1 29.75,36.65 D5.C 35,35 36,34 41,34 42.27,35.27 OK5.4
N$58
  Top 1.27: K5.NO 14.9,46 X5.3
N$59
  Top 1.27: K5.COM X5.2
N$60
  Top 1.27: K5.NC 14.9,36 X5.1
N$61
  Top 0.65: R21.1 45.55,24.45 44.23,25.77 OK6.1
N$62
  Top 0.65: LED7.A 41,20 39.73,21.27 OK6.2
N$63
  Top 0.65: R20.1 44.05,18.5 40.5,18.5 39.73,17.73 OK6.3
N$64  (via drill 0.35)
  Top 0.65: R20.2 48.5,17 v49.5,18 | v37.5,23 37.5,24 36.95,24.55 Q8.1
  Bottom 0.65: v49.5,18 38.5,18 37.5,19 v37.5,23
N$65
  Top 0.65: K6.A2 29.1,25.5 Q8.3 34,25 34,24 35,23 D6.A
N$66
  Top 0.65: K6.A1 29.75,16.15 D6.C 35,14.5 36,13.5 41.5,13.5 42.5,14.5 42.5,16 OK6.4
N$68
  Top 1.27: K6.NO 14.9,25.5 X6.3
N$69
  Top 1.27: K6.COM X6.2
N$70
  Top 1.27: K6.NC 14.9,15.5 X6.1
N$71
  Top 0.508: R22.1 LED8.A
N$72  (via drill 0.35)
  other vias: 123,80
N$73  (via drill 0.35)
  other vias: 123,81.5
N$74  (via drill 0.35)
  other vias: 123,83
N$75  (via drill 0.35)
  other vias: 121.5,74
N$76  (via drill 0.35)
  other vias: 121.5,75.5
N$77  (via drill 0.35)
  other vias: 121.5,77
N$78  (via drill 0.35)
  other vias: 121.5,78.5
N$79  (via drill 0.35)
  other vias: 121.5,80
N$80  (via drill 0.35)
  other vias: 121.5,81.5
N$81  (via drill 0.35)
  other vias: 121.5,83
N$82  (via drill 0.35)
  other vias: 120,74
N$83  (via drill 0.35)
  other vias: 120,75.5
N$84  (via drill 0.35)
  other vias: 120,77
N$85  (via drill 0.35)
  other vias: 120,78.5
N$86  (via drill 0.35)
  other vias: 120,80
N$87  (via drill 0.35)
  other vias: 120,81.5
N$88  (via drill 0.35)
  other vias: 120,83
N$89  (via drill 0.35)
  other vias: 117.5,74
N$90  (via drill 0.35)
  other vias: 117.5,75.5
N$91  (via drill 0.35)
  other vias: 117.5,77
N$92  (via drill 0.35)
  other vias: 117.5,78.5
N$93  (via drill 0.35)
  other vias: 117.5,80
N$94  (via drill 0.35)
  other vias: 117.5,81.5
N$95  (via drill 0.35)
  other vias: 117.5,83
N$96  (via drill 0.35)
  other vias: 116,74
N$97  (via drill 0.35)
  other vias: 116,75.5
N$98  (via drill 0.35)
  other vias: 116,77
N$99  (via drill 0.35)
  other vias: 116,78.5
N$100  (via drill 0.35)
  other vias: 116,80
N$101  (via drill 0.35)
  other vias: 116,81.5
N$102  (via drill 0.35)
  other vias: 116,83
N$103  (via drill 0.3)
  other vias: 109.1,95.1
N$104  (via drill 0.3)
  other vias: 110.1,95.1
N$105  (via drill 0.3)
  other vias: 111.1,95.1
N$106  (via drill 0.3)
  other vias: 111.6,94.1
N$107  (via drill 0.3)
  other vias: 109.1,94
N$108  (via drill 0.3)
  other vias: 110.1,94
N$109  (via drill 0.3)
  other vias: 109.2,99.1
N$110  (via drill 0.3)
  other vias: 110.2,99.1
N$111  (via drill 0.3)
  other vias: 111.2,99.1
N$112  (via drill 0.3)
  other vias: 112.3,99.1
N$113  (via drill 0.3)
  other vias: 113.4,99.1
N$114  (via drill 0.3)
  other vias: 113.4,98
N$115  (via drill 0.3)
  other vias: 114.5,99.1
N$116  (via drill 0.3)
  other vias: 114.5,98
N$117  (via drill 0.3)
  other vias: 98.6,94.8
N$118  (via drill 0.3)
  other vias: 97.6,94.8
N$119  (via drill 0.3)
  other vias: 96.5,94.8
N$120  (via drill 0.3)
  other vias: 96.5,96
N$121  (via drill 0.3)
  other vias: 96.5,97.2
N$122  (via drill 0.3)
  other vias: 96.5,98.4
N$123  (via drill 0.3)
  other vias: 97.4,99.2
N$124  (via drill 0.3)
  other vias: 98.4,99.2
N$125  (via drill 0.3)
  other vias: 99.5,99.2
N$126  (via drill 0.3)
  other vias: 96.5,93.7
N$127  (via drill 0.3)
  other vias: 97.6,93.7
N$128  (via drill 0.3)
  other vias: 98.6,93.6
N$129  (via drill 0.3)
  other vias: 99.7,94.8
N$130  (via drill 0.35)
  other vias: 80.1,85.7
N$131  (via drill 0.35)
  other vias: 80.1,87
N$132  (via drill 0.35)
  other vias: 80.1,88.3
N$133  (via drill 0.35)
  other vias: 80.1,89.5
N$134  (via drill 0.35)
  other vias: 80.1,90.9
N$135  (via drill 0.35)
  other vias: 80.1,92.3
N$136  (via drill 0.35)
  other vias: 80.1,93.6
N$137  (via drill 0.35)
  other vias: 80.1,94.9
N$138  (via drill 0.35)
  other vias: 80.1,96.2
N$139  (via drill 0.35)
  other vias: 80.1,97.5
N$140  (via drill 0.35)
  other vias: 80.1,98.8
N$169
  Top 0.406: JP4.16 JP4.15
N$171
  Top 0.406: JP4.18 JP4.17
RXD1  (via drill 0.35)
  Top 0.305: v55.2,70.3 40.4,70.3 20.62,90.08 4.3,90.08
  Top 0.406: JP4.14 4.3,90.08 JP4.13
  Top 0.508: U1.37 72.08,44.32 v71.4,45
  Bottom 0.305: v71.4,45 70.5,45.9 70.5,50.7 69.7,51.5 55.8,51.5 54.6,52.7 54.6,69.7 v55.2,70.3
RXD2  (via drill 0.35)
  Top 0.406: JP5.2 JP5.1 63.44,74.84 v63.6,75 | v62.8,37.1 62.85,37.05 U1.20
  Bottom 0.406: v63.6,75 75,75 76.8,73.2 76.8,41.8 74.4,39.4 65,39.4 62.8,37.2 v62.8,37.1
SCL  (via drill 0.35)
  Top 0.406: JP5.12 JP5.11
  Top 0.508: JP5.12 42.34,87.54 39.6,84.8 39.6,73.2 41.4,71.4 v63.6,71.4 | v71.4,42 71.4,40.6 72.2,39.8 72.22,39.82 U1.34
  Top 0.61: J4.RING2 37.88,3.2 38.2,3.52 39.8,3.52 40.22,3.1 44.25,3.1 J3.RING2 46.5,3.1 48.4,5 52.2,5 53.8,6.6 v53.8,8.2 | R1.2 59.8,19.8 | 59.8,19.8 74.8,19.8 76.2,21.2 76.2,39 75.38,39.82 U1.34 | v59.9,18.4 59.9,19.7 59.8,19.8
  Bottom 0.508: v63.6,71.4 74.8,71.4 75.8,70.4 75.8,46.4 v71.4,42
  Bottom 0.61: v53.8,8.2 55,8.2 55.6,8.8 55.6,15.3 56.3,16 59.1,16 59.9,16.8 v59.9,18.4
SDA  (via drill 0.35)
  Top 0.406: JP5.10 JP5.9
  Top 0.508: JP5.10 42.2,85 41,83.8 41,74 42.2,72.8 v63.2,72.8 | v75,72.8 78,72.8 79.6,71.2 79.6,49.6 78.65,48.65 78.65,43.05 76.92,41.32 75.88,41.32
  Top 0.61: J4.RING1 34.35,6.1 J3.RING1 51.6,6.1 v52.6,7.1 | U1.35 75.88,41.32 77.6,39.6 77.6,20.6 75.6,18.6 65.2,18.6 63.4,16.8 58.35,16.8 R2.2 58.2,16.95 58.2,15.2 57.6,14.6 v56.8,14.6
  Bottom 0.508: v63.2,72.8 v75,72.8
  Bottom 0.61: v52.6,7.1 55.9,7.1 56.7,7.9 56.7,14.5 v56.8,14.6
TXD1  (via drill 0.35)
  Top 0.305: v55.7,69.2 55.5,69.4 39.9,69.4 21.76,87.54 JP4.11
  Top 0.406: JP4.12 JP4.11
  Top 0.508: U1.38 72.38,45.82 v71.4,46.8
  Bottom 0.305: v71.4,46.8 71.4,51 70.12,52.28 56,52.28 55.28,52.99 55.28,68.78 v55.7,69.2
TXD2  (via drill 0.35)
  Top 0.406: U1.21 64.5,28.72 64.2,29.02 v64.2,36.7 | JP5.4 JP5.3 48.37,77.38 49.75,76 v62.75,76
  Bottom 0.406: v62.75,76 75.4,76 77.8,73.6 77.8,41.4 74.8,38.4 65.4,38.4 64.2,37.2 v64.2,36.7
VBUS
  Top 0.508: D8.A 51.56,87 F2.2 50.38,87.34 C1.1
X_VBUS
  Top 0.508: CONN1.VBUS1 57.26,94.04 56.8,94.5 56.8,95.7 55.7,96.8 53.9,96.8 52.9,95.8 52.9,94.6 52.36,94.06 CONN1.VBUS2 52.36,92.26 52,91.9 51.4,91.9 50.8,91.3 F2.1

## Text on the board
tPlace: NC | GND | NC | GND | TXD1 | 5V | PWR | RXD1 | SCL | GND | SDA | CS | GND | MOSI | 3.3V | CLK | TXD2 | MISO | RXD2 | BOOT | RESET
tNames: CSF | D1 | D2 | A1 | A2 | I2C | I2C